# Altium PCB Schematic_RX.PcbDoc
Units mil, origin at the board's own origin, x right, y up, seen from the top; angles counter-clockwise.
Board outline 3950.03 x 2375.03 mil, 2 copper layers (Top Layer, Bottom Layer); 62 components, 46 nets, 223 pads, 40 vias.
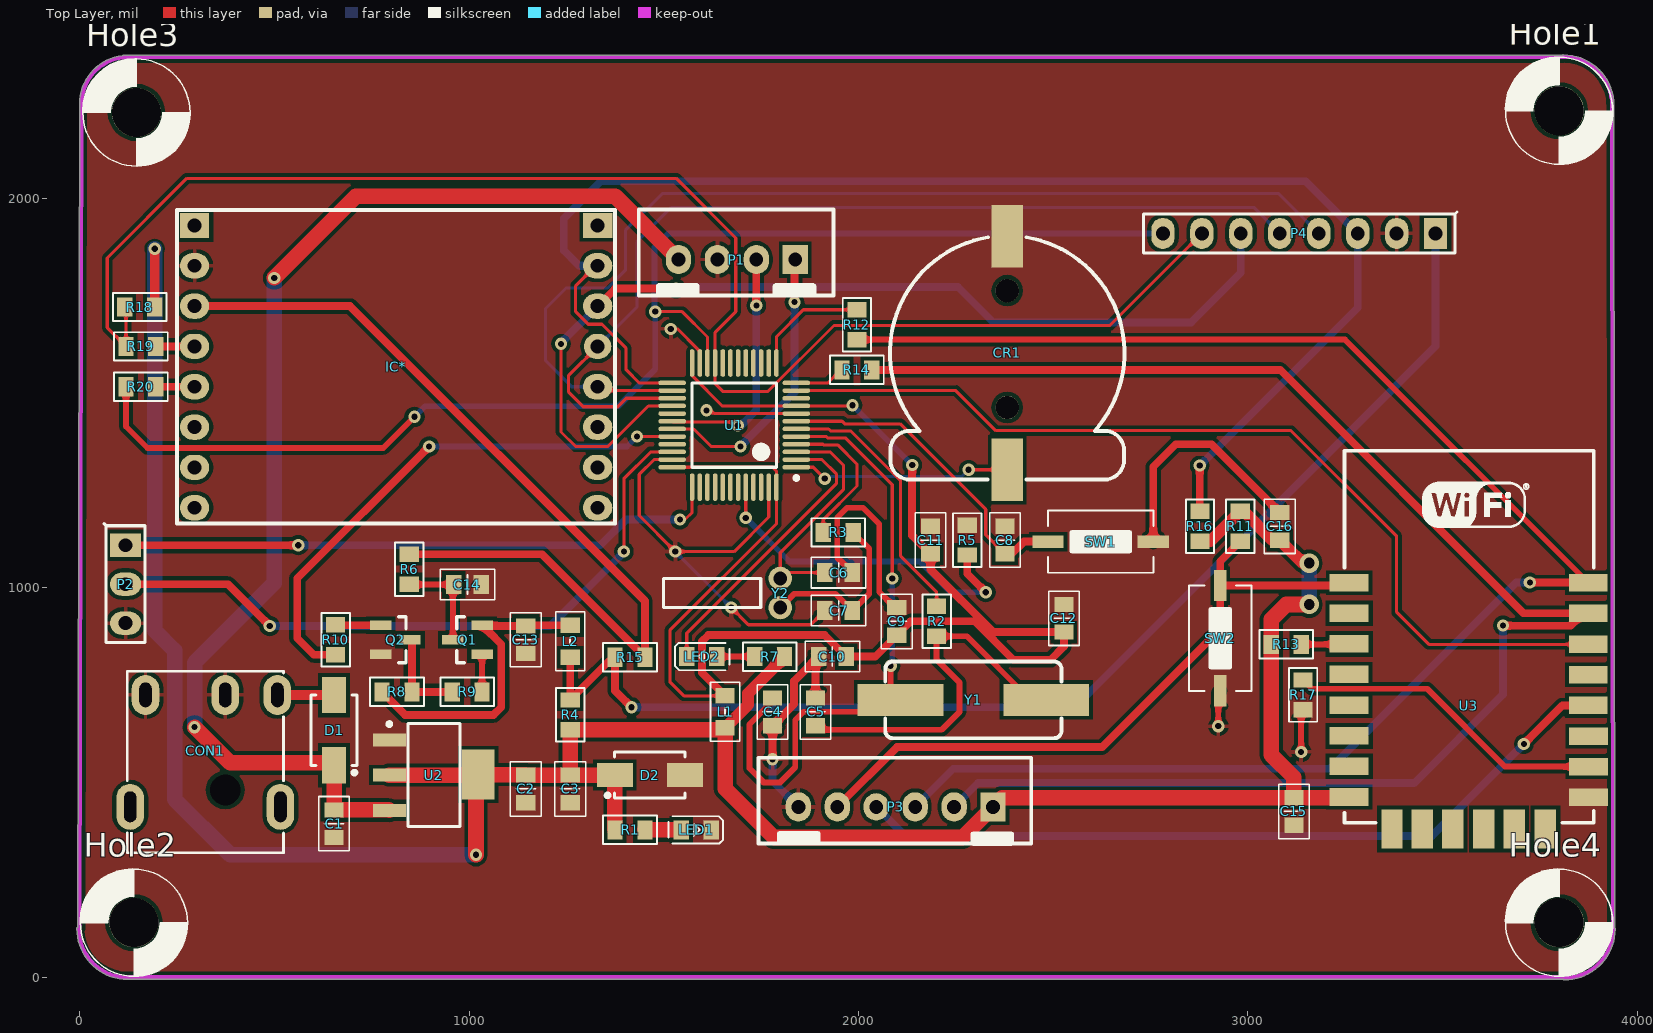
[diagram p0: Top Layer view]
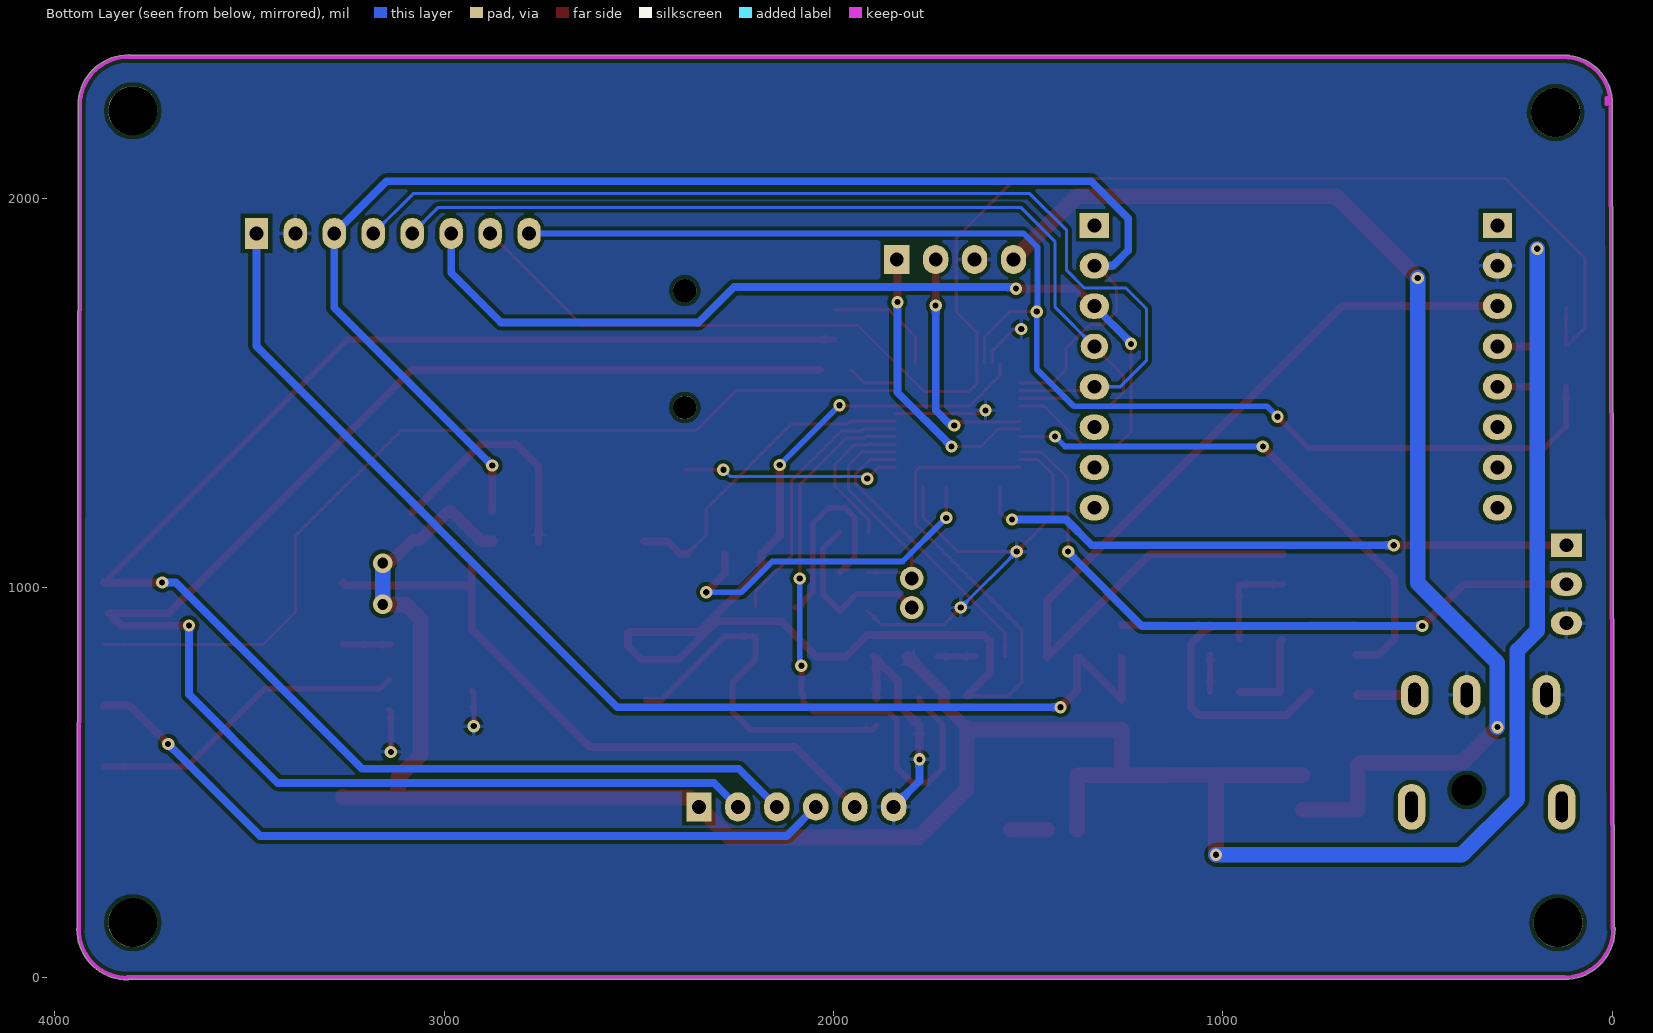
[diagram p1: Bottom Layer view, seen from below]
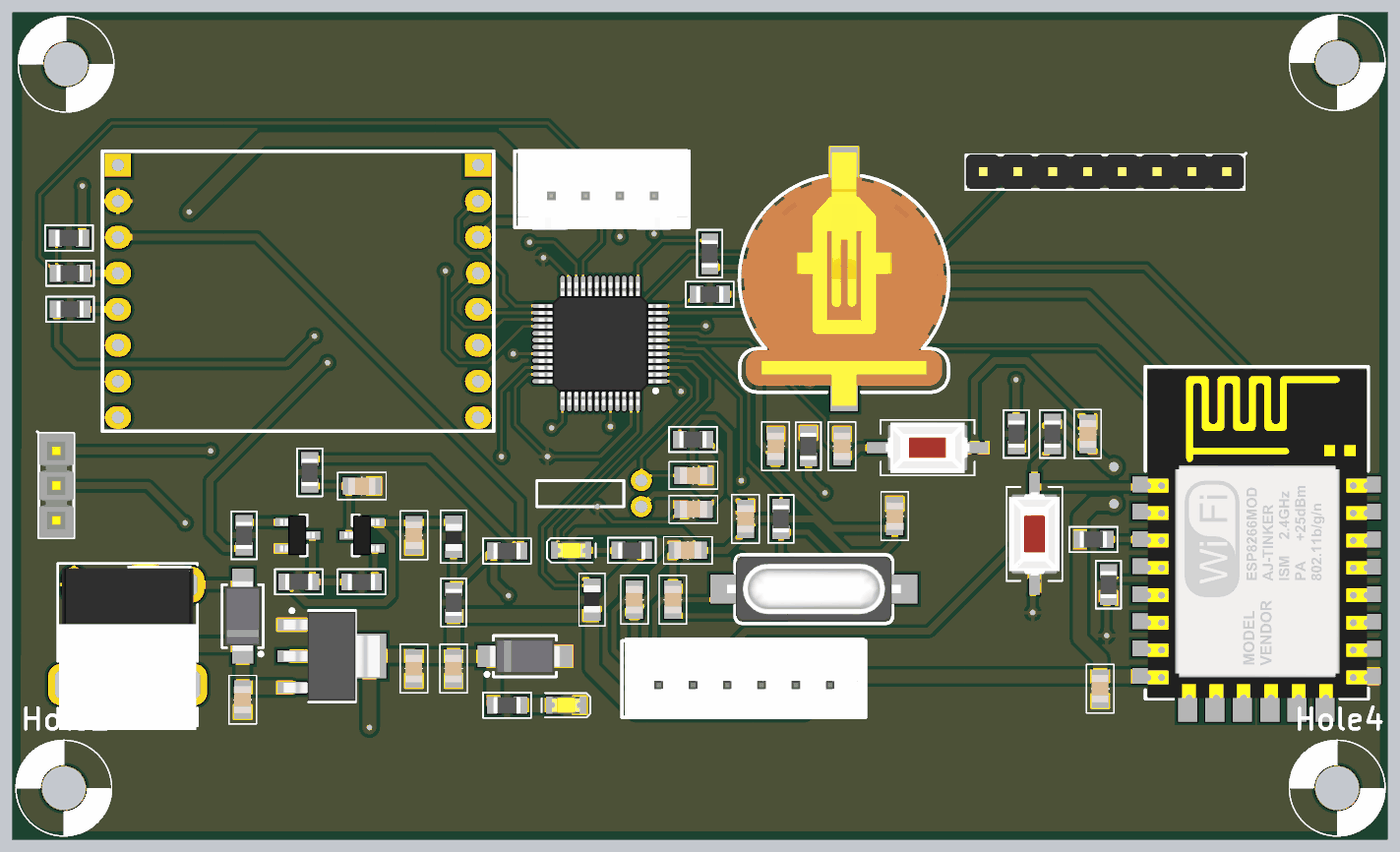
[diagram p2: 3D render of the assembled board from above, using the file's embedded part models]

## Layer stack, top to bottom
Top Solder: solder mask 0.4, Solder Resist, Dk 3.5
Top Layer: signal copper 1.4
Dielectric 1: dielectric 12.6, FR-4, Dk 4.8
Bottom Layer: signal copper 1.4
Bottom Solder: solder mask 0.4, Solder Resist, Dk 3.5

## Board outline
-7.01,124 cw(c-2,124) -5.04,127.99 -0.01,2242.01 cw(c125,2242) 110.16,2366.13 cw(c113,2362) 113,2367.01 3807.29,2367.22 cw(c3810,2363) 3810,2368.01 cw(c3810,2238) 3940.01,2238 cw(c3810,2238) 3940.01,2238 3942.03,125.98 cw(c3938,123) 3943.01,123 cw(c3813,123) 3813,-7.01 cw(c3813,-2) 3808.99,-5.01 126,-5.02 cw(c123,-1) 123,-6.01 cw(c123,124)

## Design rules (kind name [scope] priority, off if disabled: settings)
Clearance [All] p1: gap=10 ignorepadtopadclearanceinfootprint=FALSE except(0: Arc-Hole Track-Hole SMDPad-Hole THPad-Hole Via-Hole Fill-Hole Poly-Hole Region-Hole Text-Hole; 5: Arc-SMDPad Track-SMDPad SMDPad-SMDPad)
HoleSize [All] p1: absolutevalues=TRUE maxlimit=200 minlimit=1 maxpercent=80.000 minpercent=20.000
MinimumSolderMaskSliver [All] p1: minsoldermaskwidth=0
PolygonConnect [All] p1: thpad.connectstyle=Relief thpad.reliefconductorwidth=10 thpad.reliefentries=4 thpad.polygonreliefangle="90 Angle" thpad.airgapwidth=10 smdpad.connectstyle=Direct smdpad.reliefconductorwidth=10 smdpad.reliefentries=4 smdpad.polygonreliefangle="90 Angle" smdpad.airgapwidth=10 via.connectstyle=Relief via.reliefconductorwidth=10 via.reliefentries=4 via.polygonreliefangle="90 Angle" via.airgapwidth=10
RoutingVias [All] p1: holewidth=15.75 width=31.5 viastyle="Through Hole" minholewidth=15.75 minwidth=31.5 maxholewidth=15.75 maxwidth=31.5
SilkToSilkClearance [All] p1: silktosilkclearance=0
SilkToSolderMaskClearance [IsPad] p1: minsilkscreentomaskgap=0 clearancetoexposedcopper=TRUE
SolderMaskExpansion [All] p1: expansion=4
Width [All] p1: maxlimit=40 minlimit=6 preferedwidth=15 minimp=50.000000 maximp=50.000000 favimp=50.000000
26 further rules are at their usual default settings.

## Components (designator, comment, footprint, x,y, rotation, side; value= is the part's Value field where it differs from the comment)
C1 "10uF" "C 0805 (2012)" 653.54,393.7 r270 top
C2 "10uF" "C 0805 (2012)" 1145.67,483.27 r270 top
C3 "100nF" "C 0805 (2012)" 1259.84,483.27 r270 top
C4 "22pF" "C 0805 (2012)" 1779.53,681.1 r270 top
C5 "22pF" "C 0805 (2012)" 1889.76,681.1 r90 top
C6 "10pF" "C 0805 (2012)" 1948.82,1038.39 r0 top
C7 "10pF" "C 0805 (2012)" 1948.82,940.94 r180 top
C8 "100nF" "C 0805 (2012)" 2375.98,1122.05 r90 top
C9 "100nF" "C 0805 (2012)" 2098.43,913.39 r90 top
C10 "100nF" "C 0805 (2012)" 1933.07,822.83 r180 top
C11 "100nF" "C 0805 (2012)" 2185.04,1122.05 r90 top
C12 "10uF" "C 0805 (2012)" 2527.56,921.26 r90 top
C13 "10uf" "C 0805 (2012)" 1145.67,866.14 r270 top
C14 "10uf" "C 0805 (2012)" 996.06,1007.87 r0 top
C15 "10uF" "C 0805 (2012)" 3118.08,425.2 r270 top
C16 "100nF" "C 0805 (2012)" 3081.89,1157.48 r90 top
CON1 "CON DC PWR" "CON DC-044" 129.92,318.9 r0 top
CR1 "" "CON CR1220" 2381.89,1302.6 r90 top
D1 "SS34" "DO-214AC (SMA)" 653.54,633.86 r270 top
D2 "SS14" "DO-214AC (SMA)" 1464.57,518.7 r180 top
Hole1 "3mm" SCREW/3M/7M 3799.21,2224.41 r0 top
Hole2 "3mm" SCREW/3M/7M 139.56,139.56 r0 top
Hole3 "3mm" SCREW/3M/7M 146,2220 r0 top
Hole4 "3mm" SCREW/3M/7M 3799.21,139.56 r0 top
IC* "SX1278m" SX1287m 50.28,1340.03 r0 top
L1 "600 Ohm" "Inductor SMD 0805 (2012)" 1657.48,681.1 r270 top
L2 "Ferrite 80R" "Inductor SMD 0805 (2012)" 1259.84,862.2 r90 top
LED1 "RedLed" "Led SMD 0805" 1582.68,377.95 r0 top
LED2 "Blue Led" "Led SMD 0805" 1598.43,822.83 r180 top
P1 "Header 4" "CON Header 4" 1638.8,1813.52 r180 top
P2 "Header 3" "Header 3" 118.11,1108.86 r270 top
P3 "Header 6" "CON Header 6" 2345.67,437.01 r180 top
P4 "Header 8" "Header 8" 3481.89,1909.45 r180 top
Q1 "IRLML6402" SOT-23 996.06,866.14 r180 top
Q2 "2SC1815" SOT-23 811.02,866.14 r0 top
R1 "4k7" "R 0805 (2012)" 1413.39,377.95 r0 top
R2 "330" "R 0805 (2012)" 2200.79,913.39 r270 top
R3 "0" "R 0805 (2012)" 1947.83,1141.73 r0 top
R4 "R" "R 0805 (2012)" 1259.84,673.23 r90 top
R5 "10k" "R 0805 (2012)" 2279.53,1122.05 r270 top
R6 "0" "R 0805 (2012)" 846.46,1047.24 r270 top
R7 "2k2" "R 0805 (2012)" 1771.85,822.83 r0 top
R8 "10k" "R 0805 (2012)" 814.96,732.28 r180 top
R9 "1k" "R 0805 (2012)" 995.08,732.28 r0 top
R10 "4k7" "R 0805 (2012)" 657.48,866.14 r90 top
R11 "10k" "R 0805 (2012)" 2980.28,1157.48 r90 top
R12 "330" "R 0805 (2012)" 1996.06,1675.2 r270 top
R13 "10k" "R 0805 (2012)" 3098.39,854.33 r180 top
R14 "330" "R 0805 (2012)" 1996.06,1559.06 r0 top
R15 "0" "R 0805 (2012)" 1413.39,821.2 r0 top
R16 "10k" "R 0805 (2012)" 2876.94,1157.48 r90 top
R17 "10k" "R 0805 (2012)" 3141.73,724.41 r90 top
R18 "10k" "R 0805 (2012)" 154.53,1720.47 r180 top
R19 "0" "R 0805 (2012)" 157.48,1619.32 r180 top
R20 "0" "R 0805 (2012)" 157.48,1515.75 r180 top
SW1 "Button" SW/2/SMD 2622.05,1118.11 r180 top
SW2 "Button" SW/2/SMD 2929.1,870.08 r270 top
U1 "STM32F103C8T6" LQFP48_N 1681.1,1417.32 r180 top
U2 "AMS1117-33" SOT-223 909.45,518.7 r0 top
U3 "ESP8266 ESP-12-E" "ESP8266 ESP-12-E" 3912.98,366.33 r0 top
Y1 "8Mhz" "Crystal HC49US SMD" 2295.28,711.61 r180 top
Y2 "32.768Khz" "Crystal DIP-2" 1799.21,923.62 r180 top

## Footprints (in the part's own frame and the unit in brackets; to place one, negate y for a bottom-side part, rotate by r counter-clockwise, add the part's x,y. Pads: shape width x height; smd on the part's side, far side on the other; paste and mask are expansions set on the pad)
"C 0805 (2012)" [mm] "Chip Capacitor, 2-Leads, Body 2.0x1.3mm, IPC Medium Density"
  rect 1x1.25 smd: 1(-0.9,0) 2(0.9,0)
  silkscreen extent -1.78,-1 1.78,1, body extent -1,-0.64 1,0.61, height 0.6
"CON CR1220" [mil]
  rect 160x80 smd: 1(0,0) 2(600,0)
  round 60 hole 60: ""(160,0) ""(460,0)
  silkscreen extent -25,-301 597,301, body extent -64,-295 664,295, height 159
"CON DC-044" [mm]
  oval 1.8x2.6 hole 0.8 slot 1.6 at 90 deg: 1(9.6,10.3) 2(1,10.3) 3(6.2,10.3)
  oval 1.8x3 hole 0.8 slot 2 at 90 deg: 4(9.8,3) 5(0,3)
  round 0 hole 2: 6(6.2,4.1)
  silkscreen extent -0.2,0 10,11.85, body extent -0.1,-0.3 9.9,11.8, height 7.2
"CON Header 4" [mil]
  rect 65x75 hole 35.43: 1(-199,-29)
  oval 65x75 hole 35.43: 2(-99,-29) 3(1,-29) 4(101,-29)
  silkscreen extent -297,-157 203,68, body extent -294,-162 195,64, height 290
"CON Header 6" [mil]
  rect 65x75 hole 35.43: 1(0,0)
  oval 65x75 hole 35.43: 2(100,0) 3(200,0) 5(400,0) 6(500,0)
  oval 65x70 hole 35.43: 4(300,0)
  silkscreen extent -98,-126 602,99, body extent -94,-135 594,94, height 276
"Crystal DIP-2" [mil] "Available for crystal 32.768kHz"
  round 60 hole 35.43: 1(0,-25) 2(0,-100)
  silkscreen extent 50,-100 300,-25, body extent 50,-105 300,-25
"Crystal HC49US SMD" [mil]
  rect 220.47x82.67 smd: 1(-187,0) 2(187,0)
  silkscreen extent -226,-98 226,98, body extent -250,-93 250,92, height 165
"DO-214AC (SMA)" [mm] "Molded Diode, 2-Leads, Body 4.3x2.7mm, IPC Medium Density"
  rect 2.35x1.55 smd: 1(-2.286,0) 2(2.286,0)
  silkscreen extent -2.3,-1.5 2.89,1.5, body extent -2.6,-1.3 2.6,1.3, height 2.4
"ESP8266 ESP-12-E" [mil] "ESP8266 ESP-12-E"
  rect 100x45 smd: 1(-653,646) 2(-653,568) 3(-653,489) 4(-653,411) 5(-653,331) 6(-653,253) 7(-653,175) 8(-653,96) 15(-38,95) 16(-38,174) 17(-38,252) 18(-39,331) 19(-39,410) 20(-39,488) 21(-39,568) 22(-39,646)
  rect 55x100 smd: 9(-543,14) 10(-465,14) 11(-387,14) 12(-307,14) 13(-229,14) 14(-149,14)
  silkscreen extent -665,30 -25,985, body extent -658,32 -28,977, height 104
"Header 3" [mil]
  rect 60x80 hole 35.43: 1(0,0)
  oval 60x80 hole 35.43: 2(100,0) 3(200,0)
  silkscreen extent -55,-55 250,50, body extent -50,-50 250,50, height 350
"Header 8" [mil]
  rect 60x80 hole 35.43: 1(0,0)
  oval 60x80 hole 35.43: 2(100,0) 3(200,0) 4(300,0) 5(400,0) 6(500,0) 7(600,0) 8(700,0)
  silkscreen extent -55,-55 750,50, body extent -50,-51 750,47, height 336
"Inductor SMD 0805 (2012)" [mm] "Precision Wire Wound Inductor, 2-Leads, Body 2.0x1.2mm, IPC Medium Density"
  rect 1x1.25 smd: 1(-1.041,0) 2(1.041,0)
  silkscreen extent -1.92,-0.95 1.92,0.95, body extent -1.05,-0.6 0.95,0.6, height 0.95
"Led SMD 0805" [mm] "Led SMD 0805"
  rect 1x1.25 smd: 1(-0.95,0) 2(1,0)
  silkscreen extent -1.78,-0.89 1.78,0.89, body extent -1.01,-0.62 1.01,0.63, height 1.1
LQFP48_N [mm] "Thin QFP, 48-Leads, Body 7x7mm, Pitch 0.5mm, IPC Medium Density"
  oval 1.8x0.3 smd: 1(-4.05,2.75) 2(-4.05,2.25) 3(-4.05,1.75) 4(-4.05,1.25) 5(-4.05,0.75) 6(-4.05,0.25) 7(-4.05,-0.25) 8(-4.05,-0.75) 9(-4.05,-1.25) 10(-4.05,-1.75) 11(-4.05,-2.25) 12(-4.05,-2.75) 25(4.05,-2.75) 26(4.05,-2.25) 27(4.05,-1.75) 28(4.05,-1.25) 29(4.05,-0.75) 30(4.05,-0.25) 31(4.05,0.25) 32(4.05,0.75) 33(4.05,1.25) 34(4.05,1.75) 35(4.05,2.25) 36(4.05,2.75)
  oval 0.3x1.8 smd: 13(-2.75,-4.05) 14(-2.25,-4.05) 15(-1.75,-4.05) 16(-1.25,-4.05) 17(-0.75,-4.05) 18(-0.25,-4.05) 19(0.25,-4.05) 20(0.75,-4.05) 21(1.25,-4.05) 22(1.75,-4.05) 23(2.25,-4.05) 24(2.75,-4.05) 37(2.75,4.05) 38(2.25,4.05) 39(1.75,4.05) 40(1.25,4.05) 41(0.75,4.05) 42(0.25,4.05) 43(-0.25,4.05) 44(-0.75,4.05) 45(-1.25,4.05) 46(-1.75,4.05) 47(-2.25,4.05) 48(-2.75,4.05)
  silkscreen extent -4.18,-2.75 2.75,3.57, body extent -4.5,-4.47 4.5,4.53, height 1.6
"R 0805 (2012)" [mm] "Chip Resistor, 2-Leads, Body 2.0x1.3mm, IPC Medium Density"
  rect 1x1.25 smd: 1(-0.975,0) 2(0.975,0)
  silkscreen extent -1.75,-0.92 1.75,0.92, body extent -1,-0.61 1,0.59, height 0.5
SCREW/3M/7M [mm]
  round 3.2 hole 3.2: 1(0,0)
  silkscreen extent -3.54,-3.53 3.53,3.54
SOT-23 [mm] "SOT23, 3-Leads, Body 3.0x2.5mm (max), Pitch 0.95mm, IPC Medium Density"
  rect 1.4x0.6 smd: 1(-0.95,0.95) 2(-0.95,-0.95) 3(0.95,0)
  silkscreen extent 0.2,-1.5 0.7,1.5, body extent -1.28,-1.46 1.27,1.46, height 0.95
SOT-223 [mm] "SOT223, 4-Leads, Body 6.7x7.3mm (max), Pitch 2.30mm, IPC Medium Density"
  rect 2.15x0.85 smd: 1(-2.899,2.3) 2(-2.899,0) 3(-2.899,-2.3)
  rect 2.15x3.25 smd: 4(2.899,0.025)
  silkscreen extent -3.02,-3.35 1.72,3.45, body extent -3.51,-3.25 3.49,3.25, height 1.64
SW/2/SMD [mil]
  rect 80x31.5 smd: 1(-135,0) 2(135,0)
  silkscreen extent -135,-80 135,80, body extent -120,-73 120,73, height 98
SX1287m [mil] "SX1287 Module"
  oval 75x65 hole 35.43: 0(245,-135) 1(245,-31.43) 2(245,72.14) 3(245,175.71) 4(245,279.29) 5(245,382.86) 6(245,486.43) 8(1280,-135) 9(1280,-31.43) 10(1280,72.14) 11(1280,175.71) 13(1280,382.86) 14(1280,486.43)
  rect 75x65 hole 35.43: 7(245,590) 15(1280,590)
  oval 70x65 hole 35.43: 12(1280,279.29)
  silkscreen extent 200,-175 1325,630, body extent 195,-180 1330,635, height 10

## Part data
C1 C2 C3 C4 C5 C6 C7 C8 C9 C10 C11 C12 C13 C14 C15 C16: library part "Capacitor NP", "Capacitor non-pol"
CON1: "DC input connector"
CR1: library part Battery
D1: library part "Diode Schottky", "Schottky Diode", Code_JEDEC=DO-214-AA, LatestRevisionDate=17-Jul-2002, LatestRevisionNote="Re-released for DXP Platform.", PackageReference=SMB, Published=8-Jun-2000, Publisher="Altium Limited"
D2: library part Diode, "Default Diode", Code_JEDEC=DO-214-AB, LatestRevisionDate=17-Jul-2002, LatestRevisionNote="Re-released for DXP Platform.", PackageReference=SMC, PackageVersion=Sep-1996, Published=8-Jun-2000, Publisher="Altium Limited"
Hole1 Hole2 Hole3 Hole4: library part Screw
IC*: "SX1278 - Module LoRa"
L1: library part Inductor, "Inductor"
L2: library part Inductor, "Ferrite"
LED1 LED2: library part Led, "Typical LED"
P1: "Header, 4-Pin"
P2: "Header, 3-Pin"
P3: "Header, 6-Pin"
P4: "Header, 8-Pin", LatestRevisionDate=17-Jul-2002, LatestRevisionNote="Re-released for DXP Platform.", Publisher="Altium Limited"
Q1: library part "MOSFET P-Channel", "MOSFET P-Channel"
Q2: library part "Transistor NPN", "NPN Bipolar Transistor"
R1 R2 R3 R4 R5 R6 R7 R8 R9 R10 R11 R12 R13 R14 R15 R16 R17 R18 R19 R20: library part Resistor, "Resistor", LatestRevisionDate=17-Jul-2002, LatestRevisionNote="Re-released for DXP Platform.", PackageReference=AXIAL-0.3, Published=8-Jun-2000, Publisher="Altium Limited"
SW1 SW2: library part "SW SPST", "Tact switch 2 pin"
U1: "STM32 ARM-based 32-bit MCU with 64 Kbytes Flash, 48-pin LQFP, Industrial Temperature", ComponentLink1Description="Manufacturer Link", ComponentLink1URL=www.st.com/stm32, ComponentLink2Description=Datasheet, ComponentLink2URL=http://www.st.com/stonline/products/literature/ds/13587.pdf, DatasheetVersion="rev6, Mar-2008", PackageDescription="48-Pin Low-Profile Quad Flat Pack, 7 x 7 mm Body, 0.5 mm Pitch (LQFP48)", PackageReference=LQFP48, PackageVersion=Mar-2008, Published=30-May-2008, Publisher="Altium Limited"
U2: library part AMS1117, "1A LDO Voltage Regulator, ADJ or fixed 1.5/1.8/2.5/2.85/3.3/5V"
Y1 Y2: library part Crystal

## Via types
v1: diameter 31.5, hole 15.75, Top Layer to Bottom Layer, tented both sides, 38 vias
v2: diameter 50, hole 28, Top Layer to Bottom Layer, tented both sides, 2 vias

## Nets (pads, with @x,y where several pads share a name; then routed paths per layer and width w, separated by ;. In a path a pad name is that pad's centre, name@x,y a point inside that pad or via, vN(x,y) a via of type N, cw(c..) or ccw(c..) an arc to the next point about the centre after c; other vN are vias at no path point)
3V3: C2.1 C3.1 C15.1 C16.1 D2.2 L1.2 P3.1 R1.1 R4.1 R7.2 R11.2 R13.2 R16.1 R18.1 U2.2 U2.4 U3.8 | length 7029.1
  Top Layer w25: R18.1 v1(192.91,1870.08)
  Top Layer w30: L1.2 1716.54,699.16 1716.54,729.13 R7.2 ; R16.1 2903.51,1119.09 R11.2 2989.13,1195.87 3062.95,1122.05 C16.1 3140.94,1062.99 v2(3157.45,1062.99)
  Top Layer w40: U2.2 U2.4@1022.59,518.7 ; v1(1018,314) 1018,514.11 U2.4@1022.59,518.7 ; R1.1 1374.57,378.39 D2.2 C3.1 ; v2(3157.45,956.69) 3098.39,956.69 3060.01,918.31 R13.2 3060.01,570.59 3118.08,512.52 C15.1 ; U3.8 3258.28,460.63 C15.1 ; U2.4@1022.59,518.7 U2.4 1144.67,519.7 C2.1 C3.1 ; C3.1 R4.1 1652.22,634.84 L1.2 1657.48,484.25 1783.46,358.27 2266.93,358.27 P3.1 2369.29,460.63 C15.1
  Bottom Layer w40: v1(192.91,1870.08) 192.91,889.76 244.09,838.58 244.09,456.69 386.79,314 v1(1018,314) ; v2(3157.45,956.69) v2(3157.45,1062.99)
DEBUG_LED: LED2.2 U1.2 | length 746.1
  Top Layer w8: LED2.2 1559.04,882.96 1943.13,1267.05 1943.13,1292.13 1906.52,1328.74 U1.2
ESP_BUSY: U1.11 U3.20 | length 2417.5
  Top Layer w8: U1.11 2250,1505.91 2352.91,1403 3110.78,1403 3381.89,1131.89 3381.89,937.01 3464.57,854.33 U3.20
ESP_GPIO0: P3.4 U3.18 | length 1998.1
  Top Layer w20: v1(3708.66,598.43) 3807.57,697.33 U3.18
  Bottom Layer w20: P3.4 2120.47,362.2 3472.44,362.2 v1(3708.66,598.43)
ESP_RST: P3.5 R11.1 SW2.1 U3.1 | length 1753.1
  Top Layer w20: P3.5 2099.21,590.55 2625.98,590.55 2929.1,893.67 SW2.1 ; R11.1 2929.1,1067.91 SW2.1 ; U3.1 3252.73,1005.08 SW2.1
ESP_RXD: P3.2 R14.2 U3.21 | length 4011
  Top Layer w20: R14.2 3082.94,1559.06 3707.67,934.33 3860.79,934.33 3828.29,901.83 3656.17,901.83 v1(3655,903)
  Bottom Layer w20: P3.2 2306.66,498 3427.13,498 3655,725.87 v1(3655,903)
ESP_TXD: P3.3 R12.2 U3.22 | length 4102.8
  Top Layer w15: R12.2 3249.5,1636.81 3873.32,1013 U3.22
  Top Layer w20: v1(3724,1013) U3.22@3873.32,1013
  Bottom Layer w20: P3.3 2243.66,535 3211,535 3689,1013 v1(3724,1013)
GND: C1.2 C2.2 C3.2 C4.2 C5.2 C6.2 C7.2 C8.2 C9.2 C10.2 C11.2 C12.2 C13.2 C14.2 C15.2 C16.2 CON1.2 CON1.3 CR1.2 D2.1 IC*.6 LED1.2 P1.3 P2.3 P3.6 P4.2 Q2.2 R5.1 R17.1 SW1.1 SW2.2 U1.8 U1.23 U1.35 U1.47 U2.1 U3.15 | length 3435.9
  Top Layer w7.99: v1(1673.23,948.82) 1717.42,904.63 1877.07,904.63 C7.2
  Top Layer w8: v1(1518,1664) 1536.21,1664 1587.74,1612.47 1587.74,1612.11 1592.52,1607.33 U1.23 ; U1.35 1474.96,1328.74 1437.01,1290.79 1437.01,1185.04 v1(1529.53,1092.52) 1680.71,1092.52 1769.68,1181.5 U1.47 ; v1(1609.75,1455.24) 1620.43,1455.24 1628.82,1446.85 U1.8
  Top Layer w15: C6.2 1945.67,1076.97 1945.67,1179.92 1970.78,1205.03 2011.5,1205.03 2053.37,1163.17 2053.37,988.96 2093.5,948.82 C9.2 ; v1(2924,644.34) 2924,729.98 SW2.2 ; v1(3136.78,578.05) 3136.78,681.07 R17.1
  Top Layer w20: v1(1779.53,559.06) C4.2 1834.84,700.98 1834.84,760.04 C10.2@1889.76,814.96 ; C5.2 C10.2@1889.76,814.96 ; C10.2 C10.2@1889.76,814.96 ; SW1.1 2757.05,1310.2 2814.96,1368.11 2906.69,1368.11 C16.2
  Bottom Layer w7.99: v1(1529.53,1092.52) v1(1673.23,948.82)
  Bottom Layer w20: v1(1779.53,559.06) 1779.53,503.15 P3.6
LoRa_Inter: P4.8 R20.2 U1.22 | length 3429.6
  Top Layer w8: v1(1478.12,1708.66) 1547.24,1708.66 1612.2,1643.7 U1.22
  Top Layer w15: R20.2 119.09,1413.91 174.39,1358.61 779.87,1358.61 v1(859.89,1438.63)
  Bottom Layer w15: v1(859.89,1438.63) 887.01,1465.75 1383.07,1465.75 1478.12,1560.8 v1(1478.12,1708.66) 1478.12,1722.66 1476.38,1724.41 1476.38,1874.02 1511.81,1909.45 P4.8
LoRa_Power: R10.1 U1.32 | length 1383
  Top Layer w8: v1(1431.1,1387.8) U1.32
  Top Layer w20: R10.1 601.38,827.76 559.06,870.08 559.06,1023.62 v1(897.64,1362.2)
  Bottom Layer w15: v1@897.67,1362.18 1355.99,1362.18 1405.51,1362.2 v1(1431.1,1387.8)
LoRa_Reset: P4.7 R18.2 R19.2 U1.21 | length 3934.1
  Top Layer w8: R18.2 119.09,1717.52 R19.2 70.87,1667.55 70.87,1846.46 275.41,2051 1531.68,2051 1685.04,1897.64 1685.04,1708.66 1631.89,1655.51 U1.21 1631.89,1523.61 1651.56,1503.94 1767.72,1503.94 1937.01,1673.23 2645.67,1673.23 P4.7
NetC4_1: C4.1 U1.5 Y1.2 | length 1592.4
  Top Layer w8: U1.5 1917.52,1387.8 1920.84,1384.48 1966.52,1384.48 2086.61,1264.39 v1(2086.61,1023.62)
  Top Layer w15: C4.1 1779.53,707.92 1720.47,648.87 1720.47,535.98 1756.46,500 1799.21,500 1837.8,538.58 1837.8,659.89 1859.01,681.1 2052.17,681.1 2077.76,706.7 2077.76,723.69 2082.68,728.6 v1(2082.68,799.21)
  Bottom Layer w15: v1(2082.68,799.21) 2086.61,803.15 v1(2086.61,1023.62)
NetC5_1: C5.1 R2.2 Y1.1 | length 961.2
  Top Layer w15: C5.1 1900.59,634.84 2213.58,634.84 2259.84,681.1 2259.84,755.91 2200.79,814.96 R2.2 2278.54,875 2441.93,711.61 Y1.1
NetC6_1: C6.1 U1.3 Y2.2 | length 613.1
  Top Layer w8: U1.3 1927.57,1348.43 1961.13,1314.87 1961.13,1251.59 1799.21,1089.67 Y2.2 1813.98,1038.39 C6.1
NetC7_1: C7.1 R3.2 Y2.1 | length 453.6
  Top Layer w15: Y2.1 1834.84,984.25 1940.94,984.25 C7.1 2027.56,984.25 2027.56,1100.39 R3.2
NetC8_1: C8.1 SW1.2 U1.7 | length 838.7
  Top Layer w8: U1.7 1958.06,1427.17 1964.75,1420.48 2107.08,1420.48 2326.77,1200.79 2326.77,1135.83 C8.1
  Top Layer w20: C8.1 2393.5,1086.61 2425,1118.11 SW1.2
NetC13_1: C13.1 L2.2 Q1.2 R8.2 | length 794.8
  Top Layer w20: R8.2 835.63,673.23 1062.99,673.23 1082.68,692.91 1082.68,854.33 Q1.2@1035.43,901.57 ; Q1.2 Q1.2@1035.43,901.57 ; L2.2 1147.3,903.2 C13.1 Q1.2@1035.43,901.57
NetC14_1: C14.1 Q1.3 R6.2 | length 257.1
  Top Layer w15: R6.2 847.44,1007.87 C14.1 958.66,1005.91 Q1.3
NetCON1_1: CON1.1 D1.1 | length 145.9
  Top Layer w25: CON1.1 652.99,724.41 D1.1
NetIC*_3: IC*.3 R20.1 | length 99.4
  Top Layer w20: R20.1 IC*.3
NetIC*_4: IC*.4 R19.1 | length 99.4
  Top Layer w20: R19.1 IC*.4
NetIC*_5: IC*.5 R6.1 R15.2 | length 2329.4
  Top Layer w20: IC*.5 694.43,1722.89 1451.77,965.55 R15.2 1187.35,1085.63 R6.1
NetLED1_1: LED1.1 R1.2 | length 93.5
  Top Layer w40: R1.2 LED1.1
NetLED2_1: LED2.1 R7.1 | length 97.7
  Top Layer w15: LED2.1 R7.1
NetQ1_1: Q1.1 R9.2 | length 96.5
  Top Layer w15: R9.2 Q1.1
NetQ2_1: Q2.1 R10.2 | length 116.5
  Top Layer w15: R10.2 R10.2@658.46,903.54
  Top Layer w20: R10.2@658.46,903.54 Q2.1
NetQ2_3: Q2.3 R8.1 R9.1 | length 239.2
  Top Layer w20: Q2.3 853.35,861.22 R8.1 R9.1
NetR2_1: R2.1 U1.6 | length 683.3
  Top Layer w8: U1.6 1923.29,1407.48 1928.29,1402.48 1979.41,1402.48 2108.28,1273.61 2108.28,1080.7 2200.79,988.19 R2.1
NetR3_1: R3.1 U1.4 | length 387.8
  Top Layer w8: U1.4 1908.36,1368.11 1909.99,1366.48 1946.51,1366.48 1996.06,1316.93 1996.06,1261.06 1909.45,1174.45 R3.1
NetR5_2: R5.2 U1.44 | length 889
  Top Layer w8: v1(1710.63,1179.13) U1.44
  Top Layer w20: R5.2 2279.53,1035.43 v1(2326.77,988.19)
  Bottom Layer w15: v1(1710.63,1179.13) 1710.88,1179.13 1823.08,1066.93 2157.48,1066.93 2236.22,988.19 v1(2326.77,988.19)
NetR13_1: R13.1 U3.3 | length 123.6
  Top Layer w15: R13.1 3258.98,854.33 U3.3
NetR17_2: R17.2 U3.16 | length 825.4
  Top Layer w15: R17.2 3164.37,740.16 3460.63,740.16 3660.46,540.33 U3.16
SPI_MISO: IC*.12 P4.5 U1.27 | length 2463.8
  Top Layer w8: IC*.12 1255.91,1544.95 1255.91,1501.97 1293.31,1464.57 1381.89,1464.57 1403.54,1486.22 U1.27
  Bottom Layer w7.99: IC*.12 1431.1,1720.15 1431.1,1887.8 1519.68,1976.38 3014.96,1976.38 P4.5
SPI_MOSI: IC*.13 P4.6 U1.28 | length 2569.3
  Top Layer w8: v1(1236.22,1625.98) 1236.22,1399.61 1273.62,1362.2 1356.3,1362.2 1460.63,1466.54 U1.28
  Top Layer w20: IC*.13 1375.1,1767.72 v1(1531.5,1767.72)
  Bottom Layer w7.99: v1(1236.22,1625.98) v1@1236.22,1628.84
  Bottom Layer w20: v1@1236.22,1628.84 IC*.13 ; v1(1531.5,1767.72) 1535.43,1771.65 2255.91,1771.65 2346.46,1681.1 2854.33,1681.1 2981.89,1808.66 P4.6
SPI_NSS: IC*.14 P4.3 R16.2 U1.25 | length 3701.5
  Top Layer w8: IC*.14 1325.28,1826.46 1273.62,1774.81 1273.62,1708.78 1306.01,1676.39 1341.47,1676.39 1403.54,1614.31 1403.54,1559.06 1437.01,1525.59 U1.25
  Top Layer w20: v1(2876.26,1313.27) 2876.26,1196.54 R16.2
  Bottom Layer w20: IC*.14 1282.54,1826.46 1243,1866 1243,1947.72 1338.58,2043.31 3148.03,2043.31 P4.3 3281.89,1718.9 v1(2876.26,1313.27)
SPI_SCK: IC*.11 P4.4 U1.26 | length 2700.2
  Top Layer w8: IC*.11 1340.12,1505.91 U1.26
  Bottom Layer w7.99: IC*.11 1263.78,1515.75 1196.85,1582.68 1196.85,1716.54 1249.7,1769.39 1356,1769.39 1401.57,1814.96 1401.57,1917.32 1496.06,2011.81 3079.53,2011.81 P4.4
SWCLK: P2.1 U1.37 | length 1554.4
  Top Layer w8: v1(1541.59,1174.72) 1554.56,1174.72 1572.83,1193 U1.37
  Top Layer w20: P2.1 v1(561.61,1108.86)
  Bottom Layer w20: v1(561.61,1108.86) 1337.2,1108.86 1403.07,1174.72 v1(1541.59,1174.72)
SWDIO: P2.2 U1.34 | length 1743.9
  Top Layer w8: v1(1397.64,1092.52) 1397.64,1279.8 1466.26,1348.43 U1.34
  Top Layer w20: P2.2 380.91,1008.86 v1(488.19,901.57)
  Bottom Layer w20: v1(488.19,901.57) 1208.66,901.57 1397.64,1090.55 v1(1397.64,1092.52)
USART1_RX: P1.1 U1.31 | length 754
  Top Layer w7.99: P1.1@1816.48,1842.52 P1.1 P1.1@1836,1840.72
  Top Layer w8: U1.31 1576.77,1407.48 1622.05,1362.2 v1(1696.85,1362.2)
  Top Layer w20: v1(1836,1733) P1.1@1836,1840.72
  Bottom Layer w20: v1(1696.85,1362.2) 1836,1501.35 v1(1836,1733)
USART1_TX: P1.2 U1.30 | length 626.4
  Top Layer w8: U1.30 1523.34,1425.48 1680.79,1425.48 v1(1690.13,1416.14)
  Top Layer w20: v1(1737.8,1724.41) P1.2
  Bottom Layer w7.99: P1.2@1736.22,1840.94 P1.2
  Bottom Layer w20: v1(1690.13,1416.14) 1698.69,1416.14 1737.8,1455.24 v1(1737.8,1724.41)
USART2_RX: R12.1 U1.13 | length 302.9
  Top Layer w8: U1.13 1789.37,1644.3 1858.65,1713.58 R12.1
USART2_TX: R14.1 U1.12 | length 131
  Top Layer w8: U1.12 1921.26,1525.59 1954.72,1559.06 R14.1
VBAT: CR1.1 U1.1 | length 562.9
  Top Layer w7.99: v1(2282.91,1302.6) CR1.1
  Top Layer w8: U1.1 1884.13,1309.06 v1(1913.39,1279.8)
  Bottom Layer w7.99: v1(1913.39,1279.8) 1918.8,1285.22 2265.53,1285.22 v1(2282.91,1302.6)
VCC: C1.1 D1.2 P1.4 U2.3 | length 3086
  Top Layer w40: v1(295.28,641.73) 387.01,550 647.4,550 D1.2 C1.1 794.32,429.13 U2.3 ; v1(500,1795.28) 709.72,2005 1375.31,2005 P1.4
  Bottom Layer w40: v1(295.28,641.73) 295.28,807.09 500,1011.81 v1(500,1795.28)
VDD: C9.1 C10.1 C11.1 C12.1 L1.1 U1.9 U1.24 U1.36 U1.48 | length 3727.9
  Top Layer w8: U1.36 1779.53,1309.06 1789.37,1299.21 U1.48 1789.37,1163.78 1515.75,890.16 1515.75,758.04 1551.68,722.1 L1.1 ; U1.24 1572.83,1543.73 1650.03,1466.54 U1.9 1982.83,1466.54 v1(1984.53,1468.23)
  Top Layer w20: L1.1 1598.43,781.16 1598.43,862.2 1614.17,877.95 1913.39,877.95 C10.1 2043.31,822.83 C9.1 2133.84,913.37 2299.23,913.37 2397.64,814.96 2493.76,814.96 2527.56,848.76 C12.1 2345.71,885.83 2185.04,1046.5 C11.1 2137.8,1133.86 2137.8,1315.24 v1(2138.07,1314.96)
  Bottom Layer w15: v1(1984.53,1468.23) 1984.53,1468.5 v1(2138.07,1314.96)
VLORA: L2.1 P4.1 R4.2 R15.1 | length 3154.2
  Top Layer w20: L2.1 R4.2 1369.43,821.2 R15.1 1375,735.24 v1(1417.32,692.91)
  Bottom Layer w20: v1(1417.32,692.91) 2555.12,692.91 3481.89,1619.69 P4.1
pads on no net: CON1.4 CON1.5 CON1.6 CR1. Hole1.1 Hole2.1 Hole3.1 Hole4.1 IC*.0 IC*.1 IC*.2 IC*.7 IC*.8 IC*.9 IC*.10 IC*.15 U1.10 U1.14 U1.15 U1.16 U1.17 U1.18 U1.19 U1.20 U1.29 U1.33 U1.38 U1.39 U1.40 U1.41 U1.42 U1.43 U1.45 U1.46 U3.2 U3.4 U3.5 U3.6 U3.7 U3.9 U3.10 U3.11 U3.12 U3.13 U3.14 U3.17 U3.19

## Polygon pours and split planes (outlines as drawn)
GND on Bottom Layer (solid, pour order 18): 0,0 5,5 5,2362 3934.79,2362 3935,2362.21 3946,2351.21 3946,0
GND on Top Layer (solid, pour order 20): 0,0 5,5 5,2362 3940,2362 3943,2365 3947,2361 3947,0

## Keep-outs
Keep-Out Layer:
  lines w10: -2,124 ccw(c123,124) 123,-1 ; -0.03,124 5,2242 cw(c125,2242) 125,2362 ; 14.9,2242 14.9,2258 ; 113,2362 3810,2362.21 ; 123,0 3813,0 ; 3810,2363 cw(c3810,2238) 3935,2238 3937.02,123 ; 3813,-2 ccw(c3813,123) 3938,123

## Text inside footprints (layer, text, board x,y; h text height)
U3: Mechanical 13 "ANTENNA AREA" at 3260.02,1326.92 h10; Mechanical 13 "CUTOUT POLYGON" at 3260.02,1306.92 h10